# Altium PCB PCB2.PcbDoc
Units mil, origin at the board's own origin, x right, y up, seen from the top; angles counter-clockwise.
Board outline 1215 x 1000 mil, 2 copper layers (Top Layer, Bottom Layer); 12 components, 12 nets, 28 pads, 0 vias.
Unrouted connection lines stored in the file: 1.
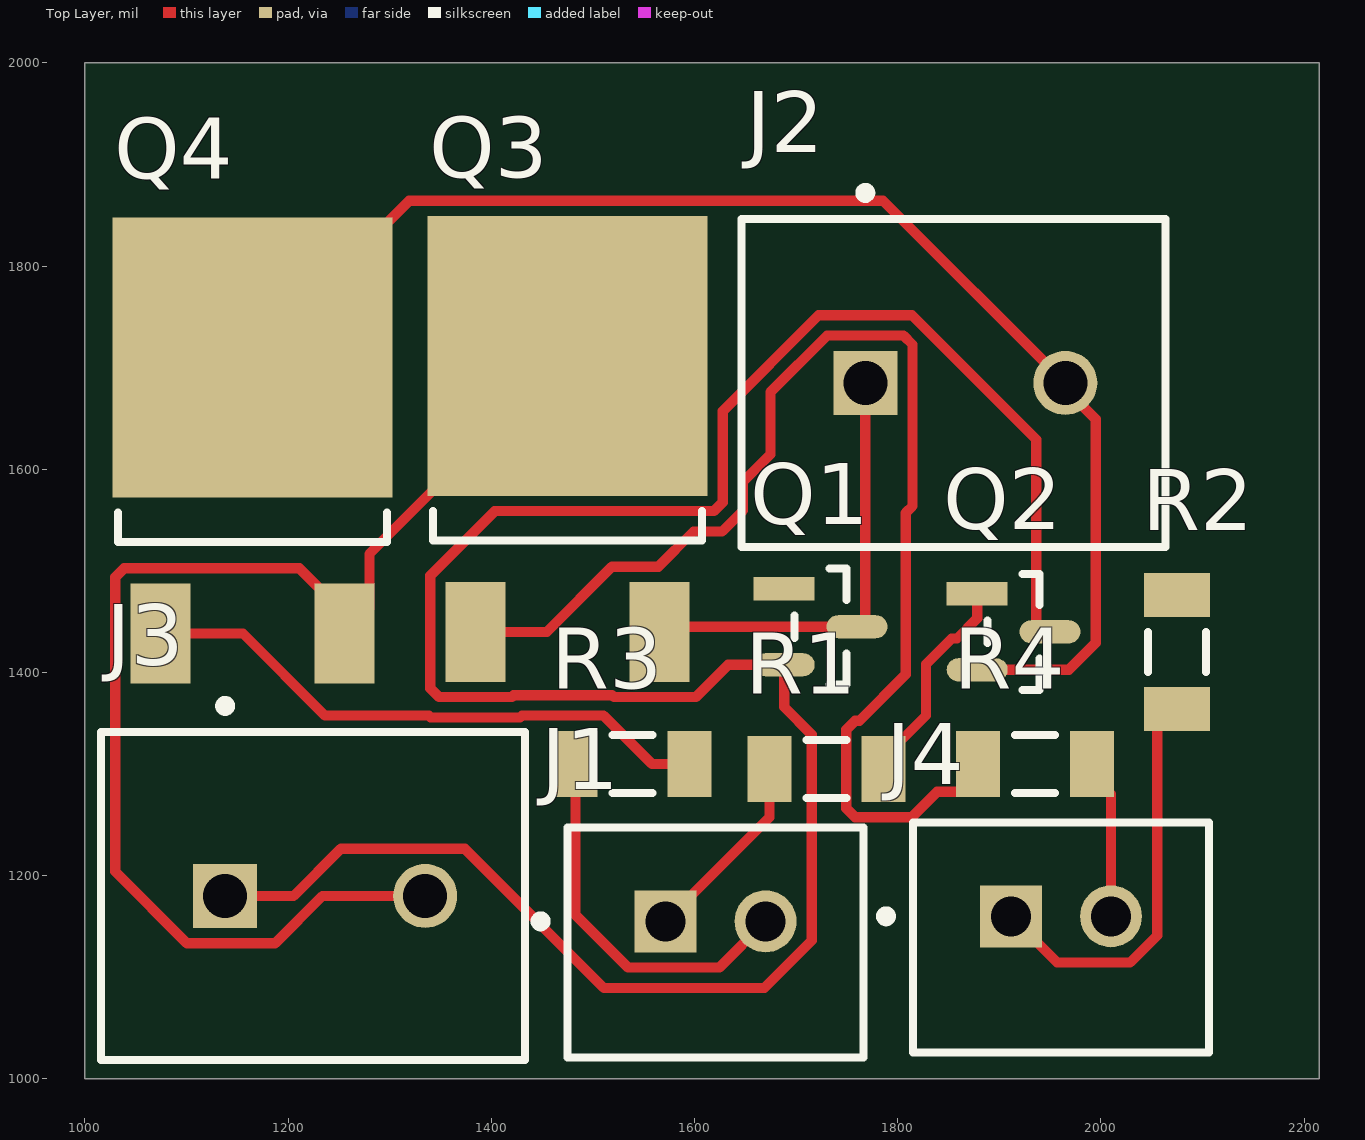
[diagram p0: Top Layer view]
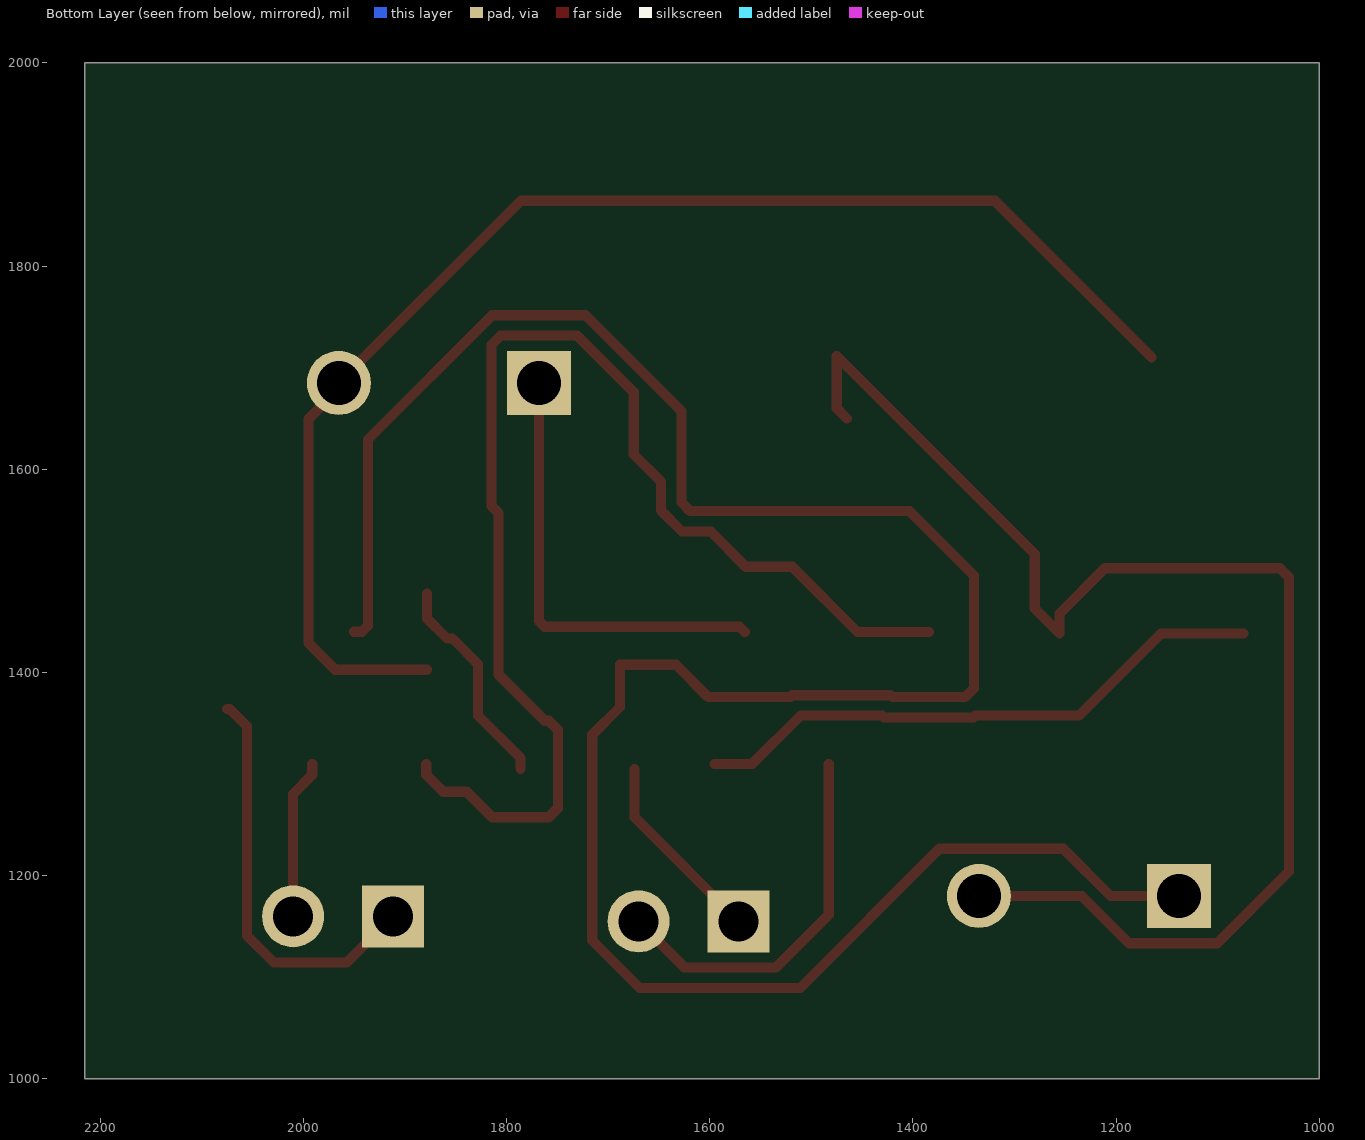
[diagram p1: Bottom Layer view, seen from below]
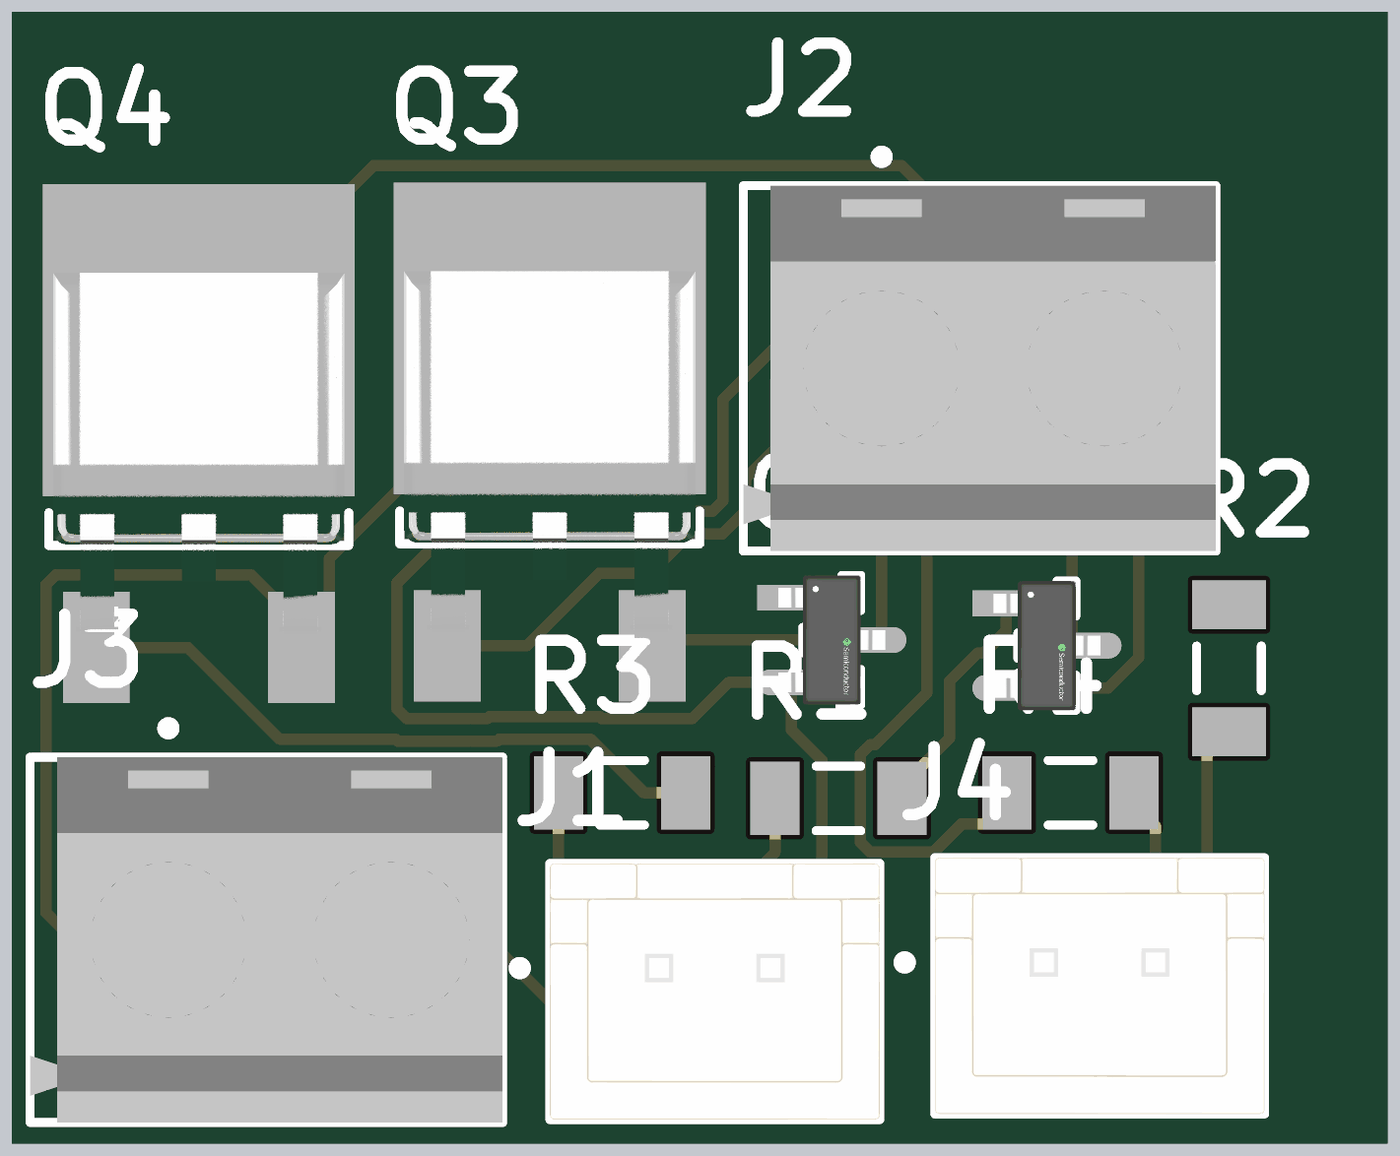
[diagram p2: 3D render of the assembled board from above, using the file's embedded part models]

## Layer stack, top to bottom
Top Solder: solder mask 0.4, Solder Resist, Dk 3.5
Top Layer: signal copper 1.4
Dielectric 1: dielectric 12.6, FR-4, Dk 4.8
Bottom Layer: signal copper 1.4
Bottom Solder: solder mask 0.4, Solder Resist, Dk 3.5

## Board outline
1000,1000 2215,1000 2215,2000 1000,2000

## Design rules (kind name [scope] priority, off if disabled: settings)
Clearance [All] p1: gap=10 ignorepadtopadclearanceinfootprint=FALSE
PolygonConnect [All] p1: connectstyle=Relief reliefconductorwidth=10 reliefentries=4 polygonreliefangle="90 Angle" airgapwidth=10
RoutingVias [All] p1: holewidth=28 width=50 viastyle="Through Hole" minholewidth=28 minwidth=50 maxholewidth=28 maxwidth=50
SolderMaskExpansion [All] p1: expansion=4 istentingtop=FALSE
SupplyNets "Schematic Supply Nets_1" [InNet('+12')] p1: voltage=0.000
SupplyNets "Schematic Supply Nets" [InNet('GND')] p2: voltage=0.000
Width [All] p1: maxlimit=10 minlimit=10 preferedwidth=10
30 further rules are at their usual default settings.

## Components (designator, comment, footprint, x,y, rotation, side; value= is the part's Value field where it differs from the comment)
J1 "B2B-XH-A(LF)(SN)" FP-B2B-XH-A_LF_SN-MFG 1620.79,1134.33 r0 top
J2 "282836-2" TECO-282836-2_V 1866.57,1685 r0 top
J3 "282836-2" TECO-282836-2_V 1236.57,1180 r0 top
J4 "B2B-XH-A(LF)(SN)" FP-B2B-XH-A_LF_SN-MFG 1960.79,1139.33 r0 top
Q1 "BSS138" FP-318-08-IPC_B 1724.17,1445 r0 top
Q2 "BSS138" FP-318-08-IPC_B 1914.17,1440 r0 top
Q3 "IRFR5410TRPBF" FP-PG-TO252-3-MFG 1475,1620 r0 top
Q4 "IRFR5410TRPBF" FP-PG-TO252-3-MFG 1165,1618.46 r0 top
R1 "ERJ-8GEY0R00V" RESC3216X70X50NL05T20 1730,1305 r0 top
R2 "ERJ-8GEY0R00V" RESC3216X70X50NL05T20 2075,1420 r270 top
R3 "ERJ-8GEY0R00V" RESC3216X70X50NL05T20 1538.9,1310 r0 top
R4 "ERJ-8GEY0R00V" RESC3216X70X50NL05T20 1935,1310 r0 top

## Footprints (in the part's own frame and the unit in brackets; to place one, negate y for a bottom-side part, rotate by r counter-clockwise, add the part's x,y. Pads: shape width x height; smd on the part's side, far side on the other; paste and mask are expansions set on the pad)
FP-318-08-IPC_B [mm]
  rect 1.524x0.578 smd paste+0 mask+0: 1(-0.91,0.95)
  rrect100% 1.524x0.578 smd paste+0 mask+0: 2(-0.91,-0.95) 3(0.91,0)
  silkscreen extent -0.65,-1.45 0.65,1.45, body extent -1.92,-1.7 1.92,1.7, height 0.25
FP-B2B-XH-A_LF_SN-MFG [mm]
  rect 1.55x1.55 hole 1 paste-2539.97 mask+0: 1(-1.25,0.525)
  round 1.55 hole 1 paste-2539.97 mask+0: 2(1.25,0.525)
  silkscreen extent -4.5,-2.88 3.7,2.88, body extent -3.8,-2.98 3.8,2.98, height 0.25
FP-PG-TO252-3-MFG [mm]
  rect 1.5x2.5 smd paste+0 mask+0: 1(-2.3,-4.575) 3(2.3,-4.575)
  rect 7x7 smd paste+0 mask+0: 4(0,2.325)
  silkscreen extent -3.36,-2.28 3.36,-1.55, body extent -3.6,-5.92 3.6,5.92, height 0.25
RESC3216X70X50NL05T20 [mm] "Chip Resistor, 2-Leads, Body 3.20x1.60mm, IPC Medium Density"
  rect 1.1x1.65 smd: 1(-1.425,0) 2(1.425,0)
  silkscreen extent -0.5,-0.72 0.5,0.72, body extent -1.63,-0.82 1.62,0.82, height 0.7
TECO-282836-2_V [mm] "Female Header, Pitch 5mm, 1 x 2 Position, Height 10mm"
  rect 1.6x1.6 hole 1.1: 1(-2.5,0)
  round 1.6 hole 1.1: 2(2.5,0)
  silkscreen extent -5.6,-4.1 5,4.87, body extent -5.6,-4.1 5,4.1, height 10

## Part data
J1 J4: library part CMP-2000-05888-3, "CONN HEADER VERT 2POS 2.5MM", Color=Natural, Contact Resistance=20mR, Current Rating=3A, Housing Color=White, Insulation Resistance=1GR, Max Operating Temperature=85°C, Max Voltage Rating (AC)=250V, Min Operating Temperature=-25°C, Connector Type="Male Pin", Contact Material=Brass, Contact Plating=Tin, Contact Type="Male Pin", Depth=5.75mm, Fastening Type=Detent, Housing Material=Polyamide, Lead Free="Lead Free", Lead Pitch=2.5mm, Length=7.4mm, Max Current Rating=3A, Max Voltage Rating (DC)=250V, Mount="Through Hole", Number of Contacts=2, Number of Positions=2, Number of Rows=1, Orientation=Straight, Packaging=Bulk, Pitch=2.5mm, REACH SVHC="No SVHC", Series=XH, Termination=Solder, Voltage Rating=250V, Voltage Rating (AC)=250V, Wire/Cable Gauge=22AWG
J2 J3: library part CMP-1684-00017-1, "Female Header, Pitch 5 mm, 1 x 2 Position, Height 10 mm, Tail Length 3.5 mm, Rohs, Bulk", Color=Green, Current=13.5A, Manufacturer="TE Connectivity", Package Description="Female Header, Pitch 5 mm, 1 x 2 Position, Height 10 mm, Tail Length 3.5 mm", Package Reference=THD, Standard Package=300, Voltage=300V, 3D Model=282836-2.pdf, Category=Connectors,Interconnects, Clamp Material - Plating=Brass-NickelPlated, Contact Material - Plating=Brass-TinPlated, Datasheet URL=http://www.te.com.cn/commerce/DocumentDelivery/DDEController?Action=showdoc&DocId=Catalog+Section%7F1308389_EUROSTYLE_TERMINAL_BLOCKS%7F0607%7Fpdf%7FEnglish%7FENG_CS_1308389_EUROSTYLE_TERMINAL_BLOCKS_0607.pdf%7F282836-2, Dynamic Catalog=BuchananSeries, Family=TerminalBlocks-WiretoBoard, Featured Product=EurostyleTerminalBlockConnectors, Features=Interlocking(Side), Housing Material=Polyamide(PA66),Nylon6/6, Manufacturer URL=http://www.te.com, Mating Orientation=HorizontalwithBoard, Mounting Type=ThroughHole, Number of Levels=1, Other Names="5ULV-02B / A98076", Packaging=Bulk, Pitch="0.197\"(5.00mm)", Positions Per Level=2, Product Training Modules=Wire-to-BoardEurostyleTerminalBlocks, RoHS Information=282836-2StatementofCompliance, Screw Material - Plating=Brass-NickelPlated, Screw Thread=M3, Series=Buchanan, Torque - Screw=0.68Nm(6Lb-In), Wire Gauge=16-30AWG, Wire Termination=Screw-RisingCageClamp
Q1 Q2: library part CMP-07173-000101-1, "MOSFET N-CH 50V 220MA SOT-23", Case/Package=SOT-23, Continuous Drain Current (ID)=220mA, Drain to Source Breakdown Voltage=50V, Drain to Source Resistance=3.5R, Gate to Source Voltage (Vgs)=20V, Input Capacitance=27pF, Max Operating Temperature=150°C, Max Power Dissipation=360mW, Min Operating Temperature=-55°C, On-State Resistance=6R, Package Quantity=1, Threshold Voltage=1.3V, Contact Plating=Tin, Current Rating=220mA, Drain to Source Voltage (Vdss)=50V, Dual Supply Voltage=50V, Element Configuration=Single, Fall Time=9ns, Height=0.93mm, Lead Free="Lead Free", Length=2.92mm, Mount="Surface Mount", Nominal Vgs=1.3V, Number of Elements=1, Number of Pins=3, Packaging="Tape and Reel", Power Dissipation=360mW, Radiation Hardening=No, Rds On Max=3.5R, REACH SVHC="No SVHC", Rise Time=9ns, Termination=SMD/SMT, Turn-Off Delay Time=20ns, Turn-On Delay Time=2.5ns, Voltage Rating (DC)=50V, Weight=0.03g, Width=1.3mm
Q3 Q4: library part CMP-32901-000090-1, "MOSFET P-CH 100V 13A DPAK", Continuous Drain Current=-13A, Drain to Source Breakdown Voltage=-100V, Drain to Source Resistance=0.205Ω, Gate To Source Voltage=20V, Input Capacitace At Vds="760pF @ -25V", Manufacturer=Infineon, Max Forward Diode Voltage=-1.6V, Max Junction Temp=+150°C, Package=PG-TO252-3, Power Dissipation=66W, Pulse Drain Current=-52A, Temperature="-55°C to +150°C", Temperature Range Low=-55°C, Automotive=No, Category=Trans, ComponentLink2Description=Datasheet, ComponentLink2URL=https://www.infineon.com/dgdl/irfr5410pbf.pdf?fileId=5546d462533600a4015356356f622107, Depletion Mode=False, Device Class L1="Discrete Semiconductors", Device Class L2=Transistors, Device Class L3=MOSFETs, Digikey Description="MOSFET P-CH 100V 13A DPAK", Drain To Source Voltage=-100V, Footprint Url=http://www.irf.com/package/hexfet/dpakfootprint.pdf, Gate Charge At Vgs="58nC @ -10V", Height=2.52mm, Lead Free=Yes, Manufacturer Part Number=IRFR5410TRPBF, Number Of Channels=1, Number Of P Channels=1, Octopart=https://octopart.com/irfr5410trpbf-infineon-65874169, Reverse Recovery Charge=650nC, Reverse Recovery Time=130ns, RoHS=TRUE, Rthja Max=50°C/W, Temperature Range High=+150°C, Threshold Vgs Max=-4V, Threshold Vgs Min=-2V, Turn Off Delay Time=45ns, Turn On Delay Time=15ns
R1 R2 R3 R4: library part CMP-2003-00541-1, Manufacturer=Panasonic, Part Number=ERJ-8GEY0R00V

## Nets (pads, with @x,y where several pads share a name; then routed paths per layer and width w, separated by ;. In a path a pad name is that pad's centre, name@x,y a point inside that pad or via, vN(x,y) a via of type N, cw(c..) or ccw(c..) an arc to the next point about the centre after c; other vN are vias at no path point)
+12: J3.1 Q1.2 Q2.3 | length 2438.2
  Top Layer w10: J3.1 1205.51,1180 1252.01,1226.5 1373.89,1226.5 1510.9,1089.49 1668.85,1089.49 1715.51,1136.15 1715.51,1338.73 1688.33,1365.91 Q1.2 1633.22,1407.6 1601.29,1375.67 1520.76,1375.67 1518.95,1377.48 1422,1377.48 1420.19,1375.67 1348.71,1375.67 1339.92,1384.46 1339.92,1495.31 1403.35,1558.74 1619.01,1558.74 1627.8,1567.53 1627.8,1657.14 1722.16,1751.5 1814.14,1751.5 1936.37,1629.27 1936.37,1445.89 1942.27,1440 Q2.3
GND: J3.2 Q3.4 Q4.3 | length 1340.5
  Top Layer w10: J3.2 1233.8,1180 1187.3,1133.5 1100.44,1133.5 1029.92,1204.02 1029.92,1493.77 1038.71,1502.56 1211.02,1502.56 1255.55,1458.03 Q4.3 1280.08,1462.87 1280.08,1516.61 Q3.4 1475,1660 Q3.4@1465,1650
NetJ1_1: J1.1 R1.1 | length 192.4
  Top Layer w10: J1.1 1673.9,1257.32 R1.1
NetJ1_2: J1.2 R3.1 | length 376.1
  Top Layer w10: R3.1 1482.8,1161.54 1534.85,1109.49 1624.49,1109.49 J1.2
NetJ2_1: J2.1 Q1.3 Q3.3 | length 441.3
  Top Layer w10: Q3.3 1570.67,1445 Q1.3 1762.26,1445 1768.15,1450.89 J2.1
NetJ2_2: J2.2 Q2.2 Q4.4 | length 1334.2
  Top Layer w10: Q4.4 1319.33,1864.33 1785.67,1864.33 J2.2 1965,1679.25 1995,1649.25 1995,1429.07 1968.53,1402.6 Q2.2
NetJ4_1: J4.1 R2.2 | length 406.3
  Top Layer w10: J4.1 1957.09,1114.49 2028.85,1114.49 2055.51,1141.15 2055.51,1347.24 2072.17,1363.9 R2.2
NetJ4_2: J4.2 R4.2 | length 157.8
  Top Layer w10: R4.2 1991.1,1299.17 2010,1280.28 J4.2
NetQ1_1: Q1.1 R2.1
NetQ2_1: Q2.1 R1.2 | length 213.7
  Top Layer w10: R1.2 1786.1,1315.83 1827.97,1357.7 1827.97,1408.17 1853.19,1433.39 1858.47,1433.39 1878.33,1453.25 Q2.1
NetQ3_1: Q3.1 R4.1 | length 1254.1
  Top Layer w10: Q3.1 1454.56,1439.88 1518.78,1504.09 1564.36,1504.09 1599.01,1538.74 1627.29,1538.74 1647.8,1559.24 1647.8,1587.53 1674.72,1614.46 1674.72,1675.78 1730.44,1731.5 1805.86,1731.5 1814.65,1722.71 1814.65,1563.72 1807.97,1557.05 1807.97,1398.06 1762.39,1352.48 1758.24,1352.48 1749.45,1343.69 1749.45,1266.31 1758.24,1257.52 1813.97,1257.52 1838.97,1282.52 1862.24,1282.52 1878.9,1299.17 R4.1
NetQ4_1: Q4.1 R3.2 | length 575.2
  Top Layer w10: Q4.1 1155.6,1438.35 1236.46,1357.48 1338.61,1357.48 1340.42,1355.67 1428.47,1355.67 1430.28,1357.48 1510.66,1357.48 1558.14,1310 R3.2